# Altium PCB Debug Board.PcbDoc
Units mil, origin at the board's own origin, x right, y up, seen from the top; angles counter-clockwise.
Board outline 4750 x 3250 mil, 2 copper layers (Top Layer, Bottom Layer); 35 components, 19 nets, 102 pads, 8 vias.
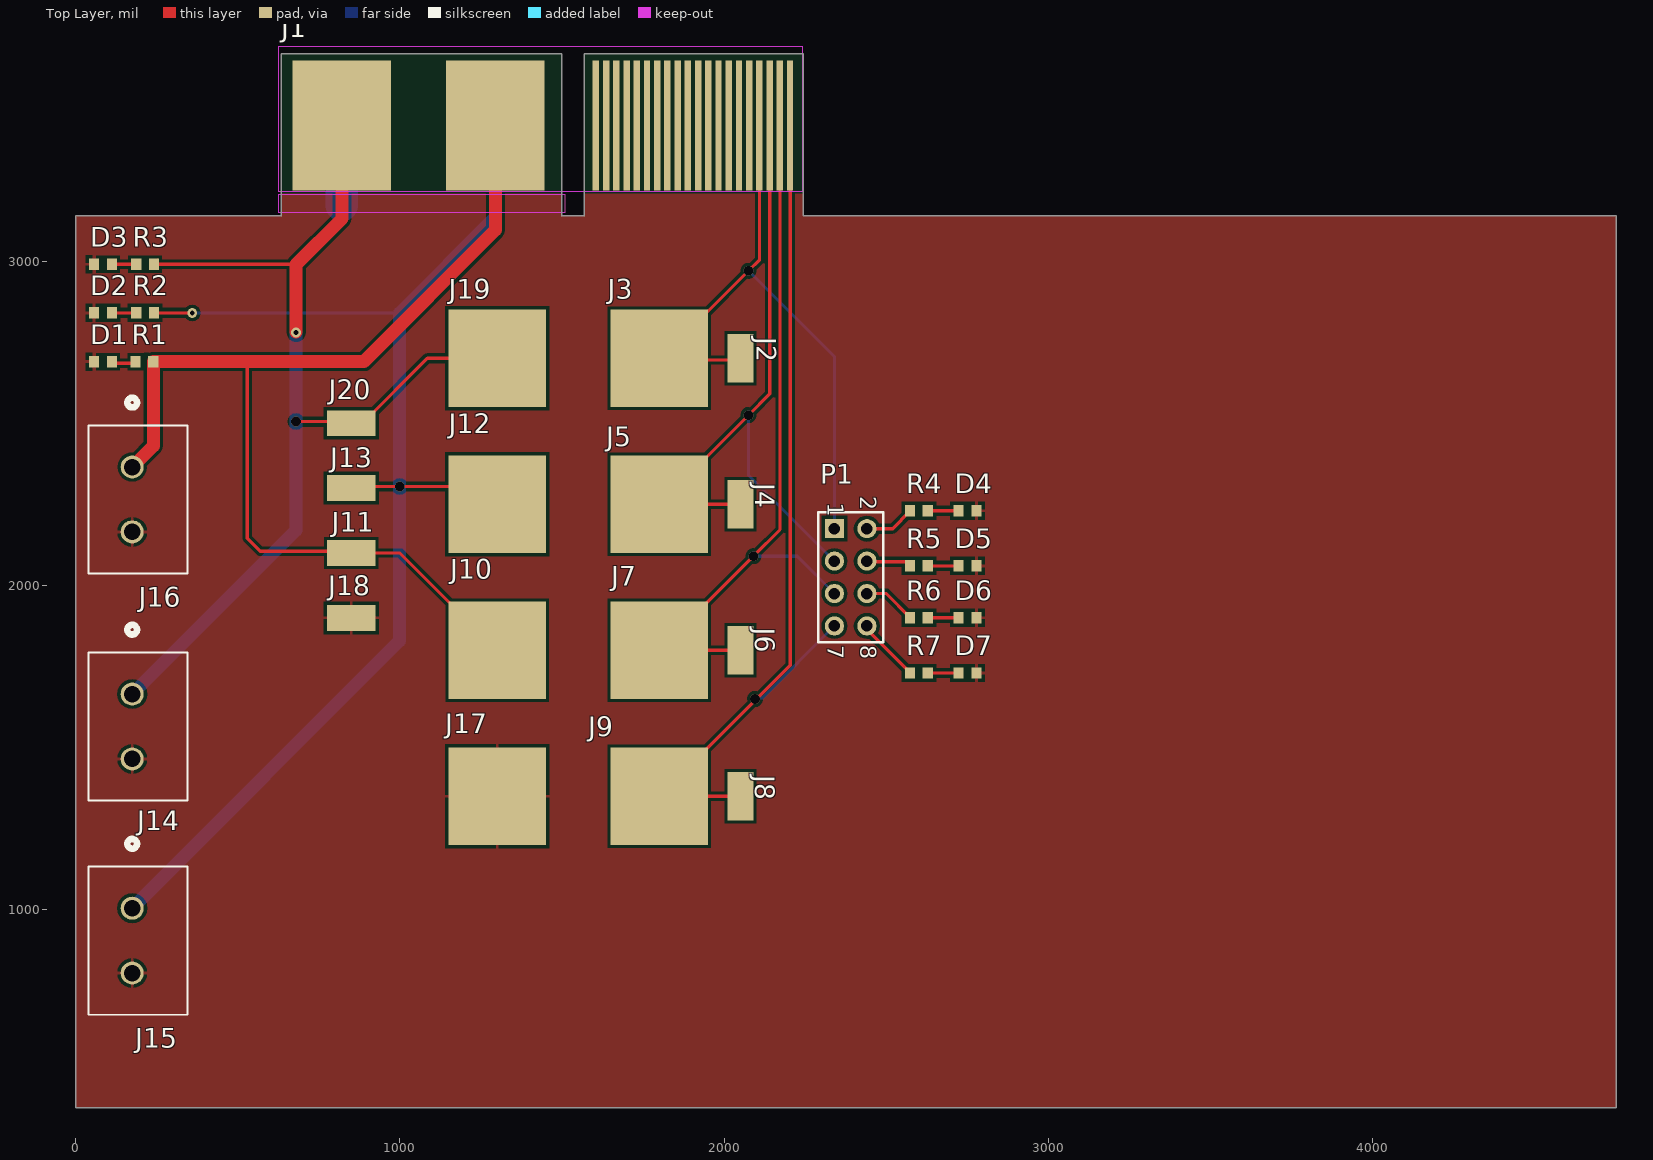
[diagram p0: Top Layer view]
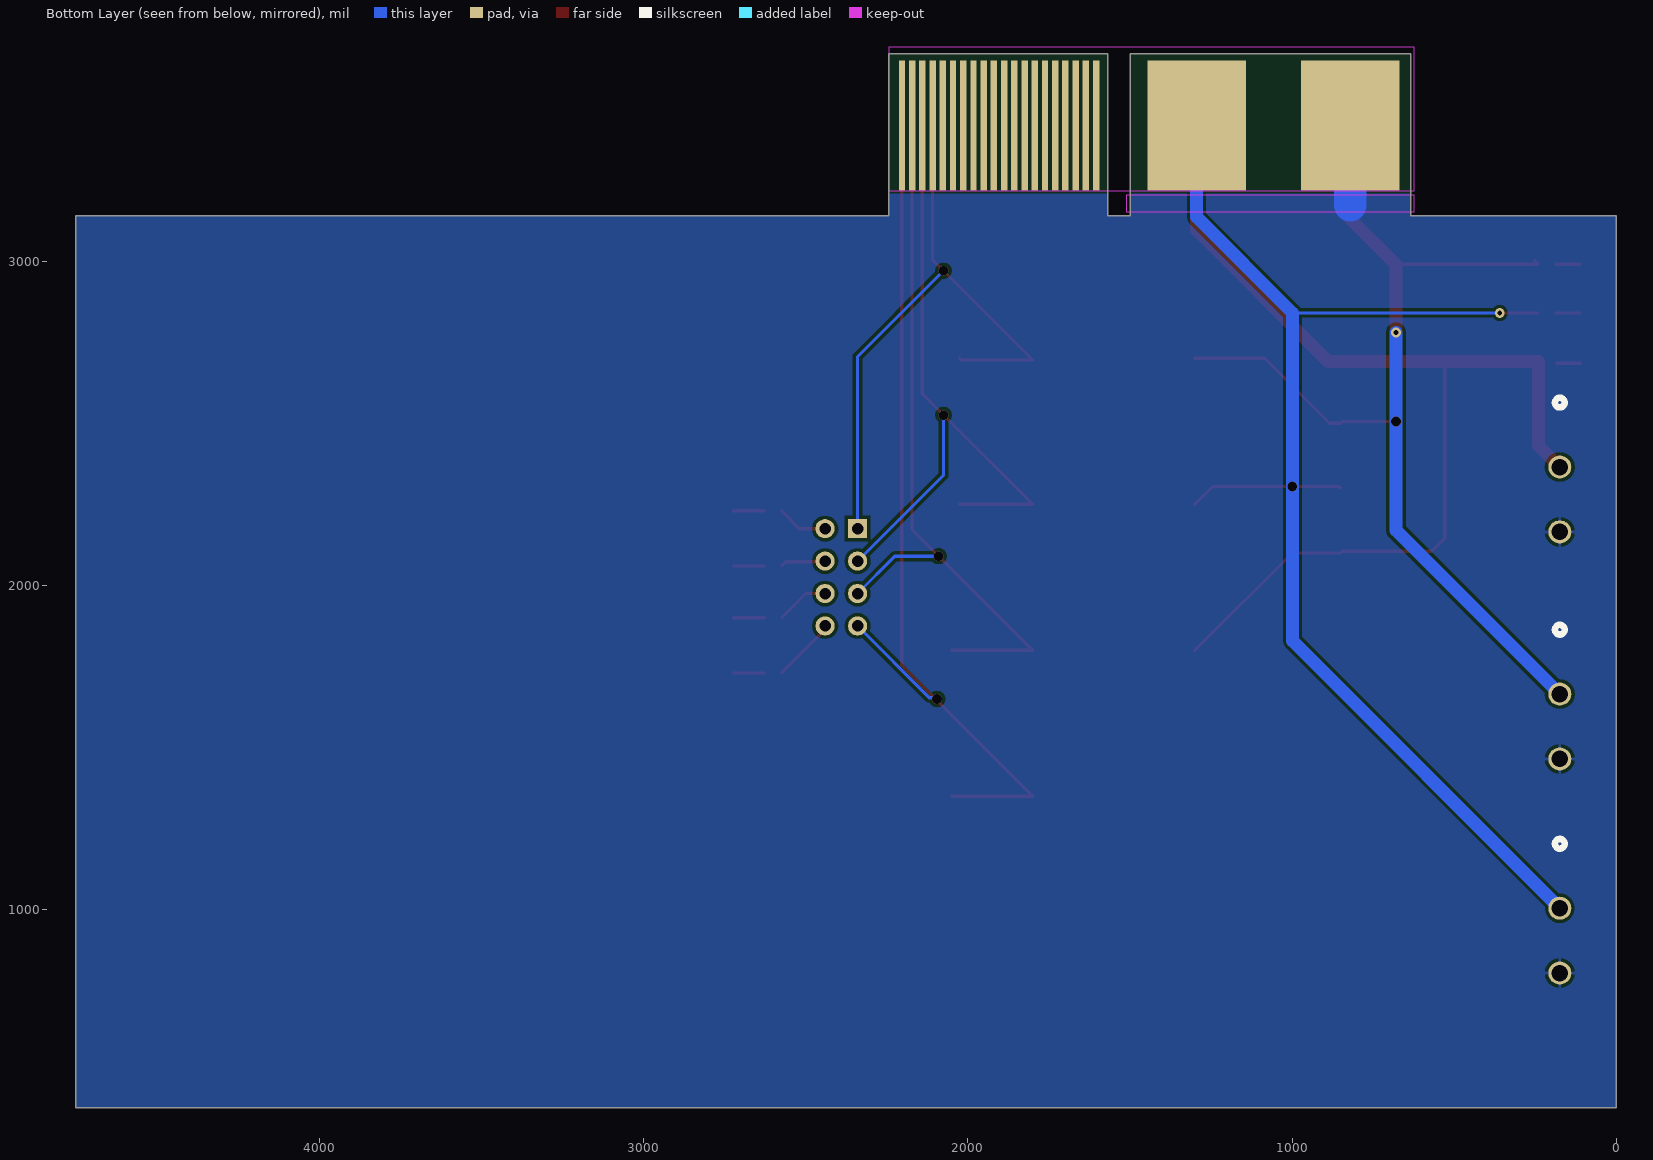
[diagram p1: Bottom Layer view, seen from below]

## Layer stack, top to bottom
Top Solder: solder mask 0.4, Solder Resist, Dk 3.5
Top Layer: signal copper 1.4
Dielectric 1: dielectric 12.6, FR-4, Dk 4.8
Bottom Layer: signal copper 1.4
Bottom Solder: solder mask 0.4, Solder Resist, Dk 3.5

## Board outline
0.5,389.5 0.5,3139.5 633.87,3139.5 633.87,3639.5 1498.87,3639.5 1498.87,3139.5 1568.87,3139.5 1568.87,3639.5 2243.86,3639.5 2243.86,3139.5 4750.5,3139.5 4750.5,389.5

## Design rules (kind name [scope] priority, off if disabled: settings)
Clearance [All] p1: gap=10 ignorepadtopadclearanceinfootprint=FALSE except(0: Arc-Hole Track-Hole SMDPad-Hole THPad-Hole Via-Hole Fill-Hole Poly-Hole Region-Hole Text-Hole; 5: Arc-Arc Arc-Track Arc-SMDPad Arc-THPad Track-Track Track-SMDPad Track-THPad SMDPad-SMDPad SMDPad-THPad THPad-THPad)
HoleSize [All] p1: absolutevalues=TRUE maxlimit=200 minlimit=1 maxpercent=80.000 minpercent=20.000
PolygonConnect [All] p1: connectstyle=Relief reliefconductorwidth=10 reliefentries=4 polygonreliefangle="90 Angle" airgapwidth=10
RoomDefinition Designator [InComponentClass('Designator')] p1: confinementstyle=ConfineIn formatcopy=TRUE lockcomponents=FALSE outline 630.5,3195 2250.5,3195 2250.5,3640 630.5,3640
RoutingVias [All] p1: holewidth=28 width=50 viastyle="Through Hole" minholewidth=28 minwidth=50 maxholewidth=28 maxwidth=50
SolderMaskExpansion SolderMaskExpansion_1 [IsVia] p1: expansion=4 istentingtop=TRUE
SolderMaskExpansion [All] p2: expansion=2 istentingtop=FALSE
Width [All] p1: maxlimit=10 minlimit=5 preferedwidth=5 minimp=50.000000 maximp=50.000000 favimp=50.000000
29 further rules are at their usual default settings.

## Classes and differential pairs
component class "Debug Board": D4 D5 D6 D7 J2 J3 J4 J5 J6 J7 J8 J9 J10 J11 J12 J13 J14 J15 J16 J17 J18 J19 J20 P1 R4 R5 R6 R7
component class Designator: D1 D2 D3 J1 R1 R2 R3

## Components (designator, comment, footprint, x,y, rotation, side; value= is the part's Value field where it differs from the comment)
D1 "LED0" 1608[0603] 85,2690 r180 top
D2 "LED0" 1608[0603] 85,2840 r180 top
D3 "LED0" 1608[0603] 85,2990 r180 top
D4 "LED0" 1608[0603] 2750,2230 r0 top
D5 "LED0" 1608[0603] 2750,2060 r0 top
D6 "LED0" 1608[0603] 2750,1900 r0 top
D7 "LED0" 1608[0603] 2750,1730 r0 top
J1 "HSEC8-120-01-L-PV-4-1" "HSEC8-120-01-L-PV-4-1 Gold Fingers" 1450,3435 r0 top
J2 "5029" 5029#1 2020,2705 r90 top
J3 "5029" "Exposed Pad"#1 1785,2700 r0 top
J4 "5029" 5029#2 2035,2240 r90 top
J5 "5029" "Exposed Pad"#2 1780,2245 r0 top
J6 "5029" 5029#3 2030,1805 r90 top
J7 "5029" "Exposed Pad"#3 1795,1815 r0 top
J8 "5029" 5029#4 2020,1355 r270 top
J9 "5029" "Exposed Pad"#4 1725,1350 r0 top
J10 "5029" "Exposed Pad"#5 1290,1875 r0 top
J11 "5029" 5029#5 855,2060 r0 top
J12 "5029" "Exposed Pad"#6 1295,2285 r0 top
J13 "5029" 5029#6 855,2290 r0 top
J14 "OSTTC022162" CONN_OSTTC022162_OST 175,1665 r270 top
J15 "OSTTC022162" CONN_OSTTC022162_OST 175,1005 r270 top
J16 "OSTTC022162" CONN_OSTTC022162_OST 175,2365 r270 top
J17 "5029" "Exposed Pad"#7 1295,1460 r0 top
J18 "5029" 5029#7 855,1855 r0 top
J19 "5029" "Exposed Pad"#8 1295,2700 r0 top
J20 "5029" 5029#8 850,2500 r0 top
P1 "Header 4X2" HDR2X4 2340,2175 r270 top
R1 "Res1" 1608[0603] 212.44,2690 r0 top value=470
R2 "Res1" 1608[0603] 215,2840 r0 top value=470
R3 "Res1" 1608[0603] 215,2990 r0 top value=470
R4 "Res1" 1608[0603] 2600,2230 r180 top value=470
R5 "Res1" 1608[0603] 2600,2060 r180 top value=470
R6 "Res1" 1608[0603] 2600,1900 r180 top value=470
R7 "Res1" 1608[0603] 2600,1730 r180 top value=470

## Footprints (in the part's own frame and the unit in brackets; to place one, negate y for a bottom-side part, rotate by r counter-clockwise, add the part's x,y. Pads: shape width x height; smd on the part's side, far side on the other; paste and mask are expansions set on the pad)
1608[0603] [mm] "Chip Capacitor, Body 1.6x0.8mm, IPC High Density"
  rect 0.8x0.9 smd: 1(-0.7,0) 2(0.7,0)
  body extent -0.87,-0.48 0.87,0.48, height 1.3
5029#1 [mil]
  rect 150x80 smd: 1(-5,-30)
5029#2 [mil]
  rect 150x80 smd: 1(10,-15)
5029#3 [mil]
  rect 150x80 smd: 1(-5,-20)
5029#4 [mil]
  rect 150x80 smd: 1(5,30)
5029#5 [mil]
  rect 150x80 smd: 1(-5,40)
5029#6 [mil]
  rect 150x80 smd: 1(-5,10)
5029#7 [mil]
  rect 150x80 smd: 1(-5,45)
5029#8 [mil]
  rect 150x80 smd: 1(0,0)
CONN_OSTTC022162_OST [mil]
  round 71 hole 51 mask+0: 1(0,0) 2(200,0)
  silkscreen extent -213,-135 328,170, body extent 0,0 10,10, height 10
"Exposed Pad"#1 [mil]
  rect 300x300 smd: 1(15,0)
"Exposed Pad"#2 [mil]
  rect 300x300 smd: 1(20,5)
"Exposed Pad"#3 [mil]
  rect 300x300 smd: 1(5,-15)
"Exposed Pad"#4 [mil]
  rect 300x300 smd: 1(75,0)
"Exposed Pad"#5 [mil]
  rect 300x300 smd: 1(10,-75)
"Exposed Pad"#6 [mil]
  rect 300x300 smd: 1(5,-35)
"Exposed Pad"#7 [mil]
  rect 300x300 smd: 1(5,-110)
"Exposed Pad"#8 [mil]
  rect 300x300 smd: 1(5,0)
HDR2X4 [mm] "Connector; Header; 4x2 Position"
  rect 1.5x1.5 hole 0.9: 1(0,0)
  round 1.5 hole 0.9: 2(0,2.54) 3(2.54,0) 4(2.54,2.54) 5(5.08,0) 6(5.08,2.54) 7(7.62,0) 8(7.62,2.54)
  silkscreen extent -1.27,-1.27 8.89,3.81
"HSEC8-120-01-L-PV-4-1 Gold Fingers" [mil]
  rect 303x400 smd paste-400: 0(-629,-17.25) 1(-156,-17.25)
  rect 19.68x400 smd paste-400: 2(154.5,-17.25) 3(186,-17.25) 4(217.5,-17.25) 5(249,-17.25) 6(280.5,-17.25) 7(312,-17.25) 8(343.5,-17.25) 9(375,-17.25) 10(406.5,-17.25) 11(438,-17.25) 12(469.5,-17.25) 13(501,-17.25) 14(532.5,-17.25) 15(564,-17.25) 16(595.5,-17.25) 17(627,-17.25) 18(658.5,-17.25) 19(690,-17.25) 20(721.5,-17.25) 21(753,-17.25)
  rect 303x400 smd far side paste-400: 22(-629,-17.25) 23(-156,-17.25)
  rect 19.68x400 smd far side paste-400: 24(154.5,-17.25) 25(186,-17.25) 26(217.5,-17.25) 27(249,-17.25) 28(280.5,-17.25) 29(312,-17.25) 30(343.5,-17.25) 31(375,-17.25) 32(406.5,-17.25) 33(438,-17.25) 34(469.5,-17.25) 35(501,-17.25) 36(532.5,-17.25) 37(564,-17.25) 38(595.5,-17.25) 39(627,-17.25) 40(658.5,-17.25) 41(690,-17.25) 42(721.5,-17.25) 43(753,-17.25)
  Keep-Out Layer region: -825,-220 792.61,-220 792.61,225 -825,225
  Keep-Out Layer region: -825,-285 60,-285 60,-230 -825,-230

## Part data
J14 J15 J16: "No Description Available", Built_By=EMA_Cory, Copyright="Copyright (C) 2018 Accelerated Designs. All rights reserved", Manufacturer_Part_Number=OSTTC022162, RefDes=RefDes, SourceLibrary=On_Shore_Technology_2019-12-02, Type=DEV, Vendor="On Shore Technology Inc"
P1: "Header, 4-Pin, Dual row", LatestRevisionDate=17-Jul-2002, LatestRevisionNote="Re-released for DXP Platform.", Publisher="Altium Limited"
R1 R2 R3 R4 R5 R6 R7: "Resistor", LatestRevisionDate=17-Jul-2002, LatestRevisionNote="Re-released for DXP Platform.", PackageDescription="Axial Device, Thru-Hole; 2 Leads; 0.3 in Pin Spacing", PackageReference=AXIAL-0.3, Published=8-Jun-2000, Publisher="Altium Limited"
D1 D2 D3 D4 D5 D6 D7: LatestRevisionDate=08-Jul-2005, LatestRevisionNote="Mech Layer 1 removed.", PackageDescription="LED; 2 Leads", PackageReference=LED-0, Published=8-Jun-2000, Publisher="Altium Limited"
J1: Supplier 1=Mouser

## Via types
v1: diameter 30, hole 30, Top Layer to Bottom Layer, tented both sides, 6 vias
v2: diameter 30, hole 15, Top Layer to Bottom Layer, tented both sides, 2 vias

## Nets (pads, with @x,y where several pads share a name; then routed paths per layer and width w, separated by ;. In a path a pad name is that pad's centre, name@x,y a point inside that pad or via, vN(x,y) a via of type N, cw(c..) or ccw(c..) an arc to the next point about the centre after c; other vN are vias at no path point)
1V8: J1.0 J14.1 J19.1 J20.1 R3.2 | length 3183
  Top Layer w10: R3.2@253.31,3002.72 242.56,2991.97 R3.2 680.64,2990 ; v1(680,2505) 845,2505 J20.1 885,2500 1085,2700 J19.1 ; v2(680,2780) v2@680.64,2780.64
  Top Layer w40: v2@680.64,2780.64 680.64,2990 821.5,3130.86 J1.0@821.5,3420
  Bottom Layer w40: J14.1 680,2170 v1(680,2505) v2(680,2780)
3V3: J1.23 J12.1 J13.1 J15.1 R2.2 | length 4110
  Top Layer w10: R2.2 v2(360,2840) ; J13.1 855,2305 v1(1000,2305) 1245,2305 J12.1
  Bottom Layer w10: v2(360,2840) 999,2840
  Bottom Layer w40: J15.1 999,1829 999,2840 1294.5,3135.5 J1.23@1294.5,3420
5V0: J1.1 J10.1 J11.1 J16.1 R1.2 | length 3356.8
  Top Layer w10: 530,2690 530,2145 570,2105 845,2105 J11.1 1000,2100 J10.1
  Top Layer w40: J16.1 240,2430 R1.2 530,2690 889,2690 1294.5,3095.5 J1.1@1294.5,3420
GND: D1.2 D2.2 D3.2 D4.2 D5.2 D6.2 D7.2 J1.22 J14.2 J15.2 J16.2 J17.1 J18.1 | length 257.7
  Bottom Layer w10: 815,3165 821.5,3171.5
  Bottom Layer w100: 821.5,3171.5 J1.22@821.5,3420
NetD1_1: D1.1 R1.1 | length 74.9
  Top Layer w10: D1.1@110,2685 R1.1@184.88,2685
NetD2_1: D2.1 R2.1 | length 74.9
  Top Layer w10: D2.1 R2.1
NetD3_1: D3.1 R3.1 | length 74.9
  Top Layer w10: D3.1 R3.1
NetD4_1: D4.1 R4.1 | length 94.9
  Top Layer w10: R4.1 D4.1
NetD5_1: D5.1 R5.1 | length 94.9
  Top Layer w10: R5.1 D5.1
NetD6_1: D6.1 R6.1 | length 94.9
  Top Layer w10: R6.1 D6.1
NetD7_1: D7.1 R7.1 | length 94.9
  Top Layer w10: R7.1 D7.1
NetJ1_18: J1.18 J2.1 J3.1 P1.1 | length 1984.8
  Top Layer w10: J2.1@2025,2700 2020,2695 1800,2695 v1(2075,2970) 2109,3004 J1.18@2109,3420
  Bottom Layer w10: v1(2075,2970) 2340,2705 P1.1
NetJ1_19: J1.19 J4.1 J5.1 P1.3 | length 2095.8
  Top Layer w10: J4.1@2025,2250 J5.1 v1(2075,2525) 2140.5,2590.5 J1.19@2140.5,3420
  Bottom Layer w10: v1(2075,2525) 2075,2340 P1.3
NetJ1_20: J1.20 J6.1 J7.1 P1.5 | length 2321.7
  Top Layer w10: J6.1 J7.1 v1(2090,2090) 2172,2172 J1.20@2172,3420
  Bottom Layer w10: v1(2090,2090) 2225,2090 P1.5
NetJ1_21: J1.21 J8.1 J9.1 P1.7 | length 2825.3
  Top Layer w10: J8.1 J9.1 2203.5,1753.5 J1.21@2203.5,3420
  Bottom Layer w10: v1(2095,1650) 2098.83,1653.83 2118.83,1653.83 P1.7
NetP1_2: P1.2 R4.2 | length 156.4
  Top Layer w10: P1.2 2519.41,2175 2572.44,2228.03 R4.2
NetP1_4: P1.4 R5.2 | length 139.8
  Top Layer w10: P1.4 2442.28,2072.72 2561.69,2072.72 2572.44,2061.97 R5.2
NetP1_6: P1.6 R6.2 | length 164.7
  Top Layer w10: P1.6 2499.41,1975 2572.44,1901.97 R6.2
NetP1_8: P1.8 R7.2 | length 199.9
  Top Layer w10: P1.8 2440,1864.41 2572.44,1731.97 R7.2
pads on no net: J1.2 J1.3 J1.4 J1.5 J1.6 J1.7 J1.8 J1.9 J1.10 J1.11 J1.12 J1.13 J1.14 J1.15 J1.16 J1.17 J1.24 J1.25 J1.26 J1.27 J1.28 J1.29 J1.30 J1.31 J1.32 J1.33 J1.34 J1.35 J1.36 J1.37 J1.38 J1.39 J1.40 J1.41 J1.42 J1.43

## Polygon pours and split planes (outlines as drawn)
GND on Top Layer "GND_L01_P002" (solid, pour order 2): 0.5,389.5 0.5,3139.5 633.87,3139.5 633.87,3639.5 1498.87,3639.5 1498.87,3139.5 1568.87,3139.5 1568.87,3639.5 2243.86,3639.5 2243.86,3139.5 4750.5,3139.5 4750.5,389.5
GND on Bottom Layer "GND_L02_P003" (solid, pour order 3): 0.5,389.5 0.5,3139.5 633.87,3139.5 633.87,3639.5 1498.87,3639.5 1498.87,3139.5 1568.87,3139.5 1568.87,3639.5 2243.86,3639.5 2243.86,3139.5 4750.5,3139.5 4750.5,389.5

## Silkscreen, mask and mechanical layers (free items; w line width, h text height)
Mechanical 1:
  lines w0.5: 629.37,3639.5 1494.37,3639.5 ; 633.87,3639.5 633.87,3139.5 0.5,3139.5 0.5,389.5 4750.5,389.5 4750.5,3139.5 2243.86,3139.5 2243.86,3639.5 ; 1498.87,3639.5 1498.87,3139.5 1568.87,3139.5 1568.87,3639.5 ; 1564.37,3639.5 2239.36,3639.5

## Text inside footprints (layer, text, board x,y; h text height)
P1: Top Overlay "2" at 2420,2275 h50 r270; Top Overlay "1" at 2320,2255 h50 r270; Top Overlay "7" at 2320,1815 h50 r270; Top Overlay "8" at 2420,1815 h50 r270